# EAGLE board TCCBot_Shield (EAGLE 5.11)
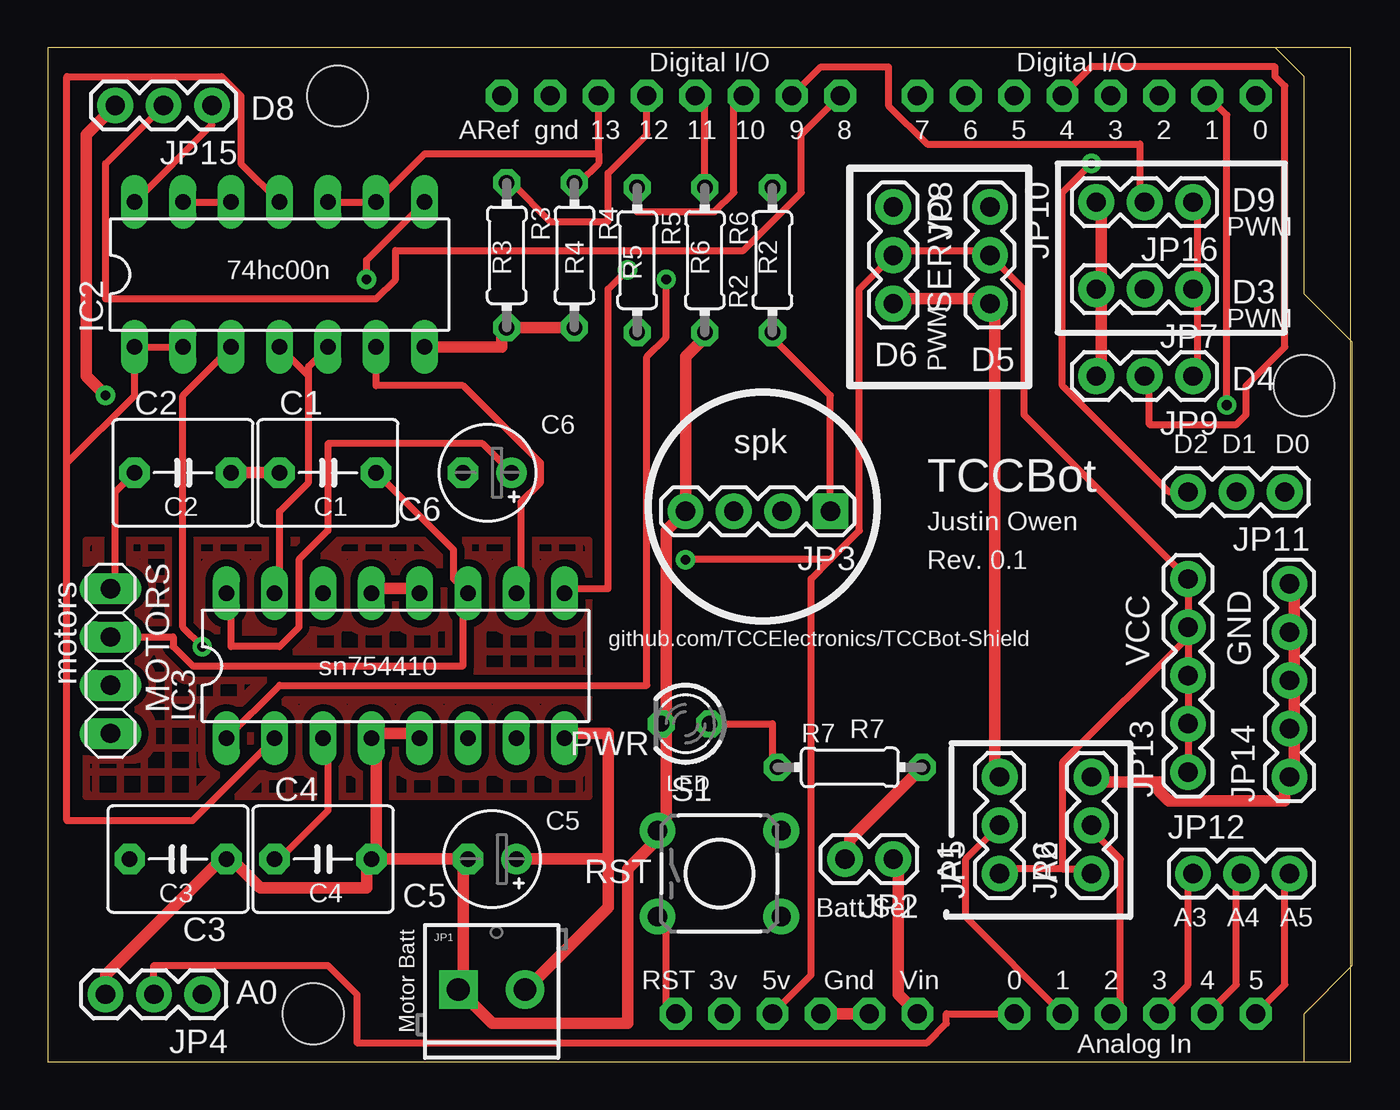
[diagram p0: board, top side]
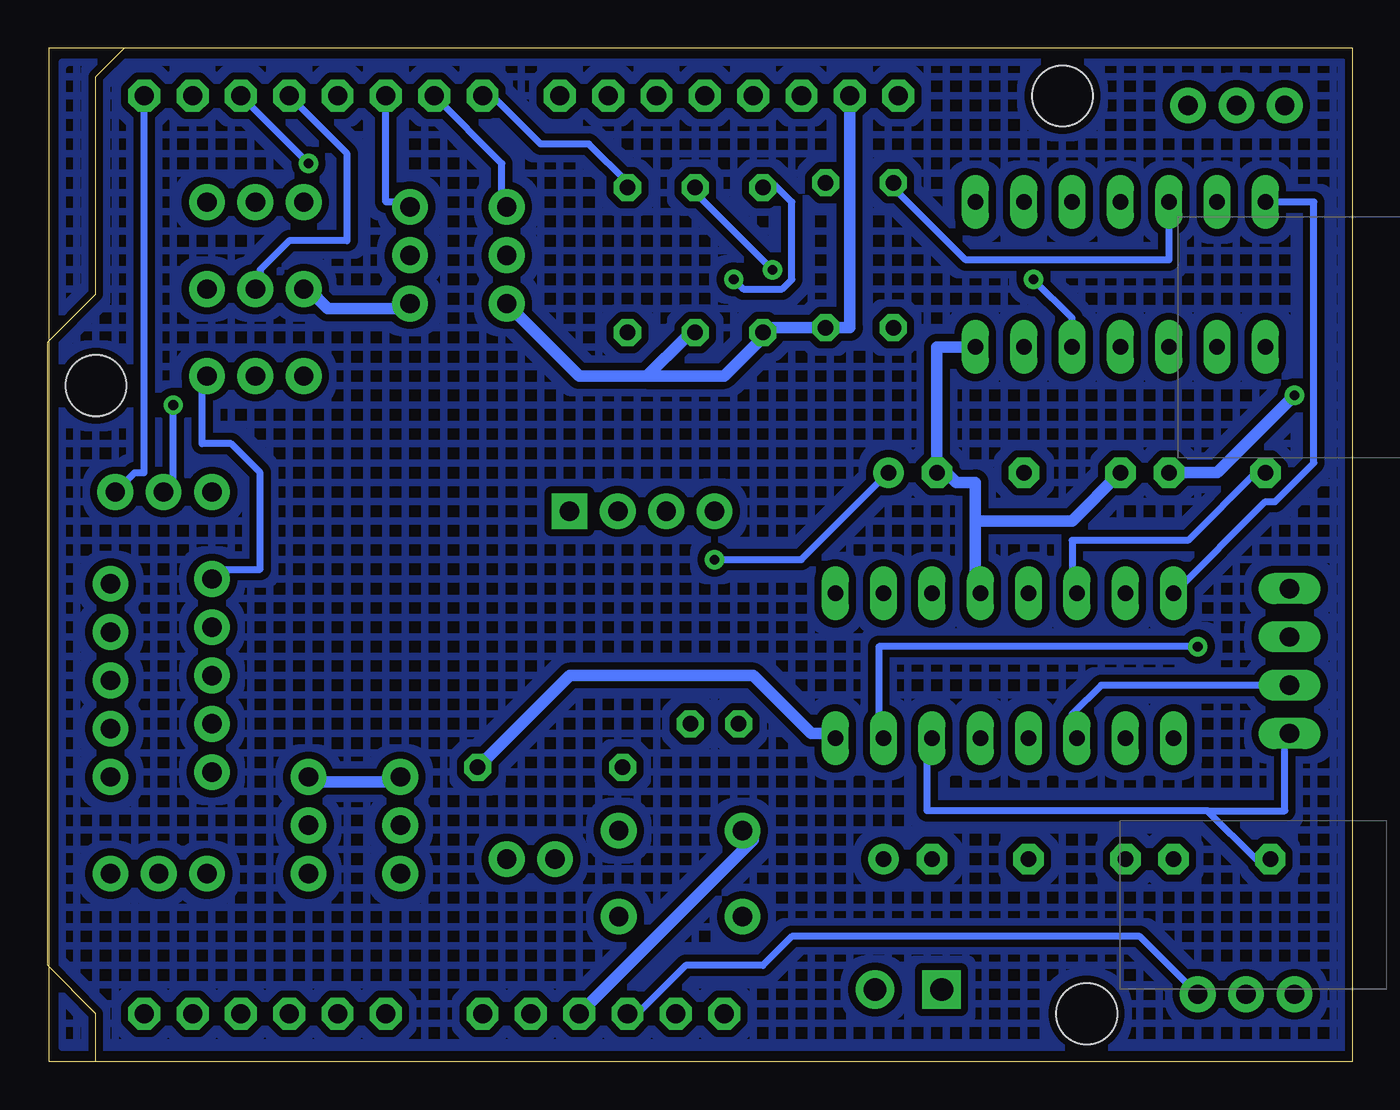
[diagram p1: board, bottom side, seen from below]

Size 68.5 x 53.33 mm. Coordinates in mm from the lower left corner, seen from the top.
Outline: 0,0 68.5,0 68.5,53.33 0,53.33 0,0
Copper layers (1*16): Top 0.035mm / dielectric 1.5mm / Bottom 0.035mm
Design rules "SparkFun": minimum track width 8mil, minimum drill 20mil, track to track 8mil, track to pad 8mil, pad to pad 8mil, via to via 8mil, smd to smd 8mil, copper to edge 10mil, drill to drill 8mil, minimum pad ring 12mil, minimum via ring 10mil, stop-mask expansion 4mil, vias tented up to drill 25mil, thermal gap 10mil
Net classes: 0 $GND: width 0.381 mm; 1 power: width 0.61 mm

## Footprints (pad centres in the part's own frame; a part is rotated, then mirrored left to right if it is on the bottom)
C5B5.5 = drill 0.813 pad 1.6 octagon: 1 -2.54,0; 2 2.54,0
E2,5-5 = drill 0.813 pad 1.6 round: + -1.27,0 | drill 0.813 pad 1.6 octagon: - 1.27,0
DIL14 = drill 0.813 long: 1 -7.62,-3.81; 2 -5.08,-3.81; 3 -2.54,-3.81; 4 0,-3.81; 5 2.54,-3.81; 6 5.08,-3.81; 7 7.62,-3.81; 8 7.62,3.81; 9 5.08,3.81; 10 2.54,3.81; 11 0,3.81; 12 -2.54,3.81; 13 -5.08,3.81; 14 -7.62,3.81
DIL16 = drill 0.813 long: 1 -8.89,-3.81; 2 -6.35,-3.81; 3 -3.81,-3.81; 4 -1.27,-3.81; 5 1.27,-3.81; 6 3.81,-3.81; 7 6.35,-3.81; 8 8.89,-3.81; 9 8.89,3.81; 10 6.35,3.81; 11 3.81,3.81; 12 1.27,3.81; 13 -1.27,3.81; 14 -3.81,3.81; 15 -6.35,3.81; 16 -8.89,3.81
SCREWTERMINAL-3.5MM-2 = drill 1.2 pad 2.032 square: 1 0,0 | drill 1.2 pad 2.032 round: 2 3.5,0
1X02 = drill 1.016 pad 1.88 round: 1 0,0; 2 2.54,0
1X04 = drill 1.016 pad 1.88 square: 1 0,0 | drill 1.016 pad 1.88 round: 2 2.54,0; 3 5.08,0; 4 7.62,0
1X03 = drill 1.016 pad 1.88 round: 1 0,0; 2 2.54,0; 3 5.08,0
1X05 = drill 1.016 pad 1.88 round: 1 0,0; 2 2.54,0; 3 5.08,0; 4 7.62,0; 5 10.16,0
1X04' = drill 1.016 long: 1 -3.81,0; 2 -1.27,0; 3 1.27,0; 4 3.81,0
LED3MM = drill 0.813 octagon: A -1.27,0; K 1.27,0
0204/7 = drill 0.813 octagon: 1 -3.81,0; 2 3.81,0
TACTILE-PTH = drill 1.016 pad 1.88 round: 1 -3.251,2.261; 2 3.251,2.261; 3 -3.251,-2.261; 4 3.251,-2.261
ARDUINO = drill 1 pad 1.676 octagon: 3V 35.56,2.54; 5V 38.1,2.54; A0 50.8,2.54; A1 53.34,2.54; A2 55.88,2.54; A3 58.42,2.54; A4 60.96,2.54; A5 63.5,2.54; AREF 23.876,50.8; D0 63.5,50.8; D1 60.96,50.8; D2 58.42,50.8; D3 55.88,50.8; D4 53.34,50.8; D5 50.8,50.8; D6 48.26,50.8; D7 45.72,50.8; D8 41.656,50.8; D9 39.116,50.8; D10 36.576,50.8; D11 34.036,50.8; D12 31.496,50.8; D13 28.956,50.8; GND 26.416,50.8; GND1 43.18,2.54; GND2 40.64,2.54; RESET 33.02,2.54; VIN 45.72,2.54 | hole 3.2: 15.24,50.8; 66.04,35.56; 13.97,2.54

## Placement (x,y rotation side)
C1  [C5B5.5]  14.73,30.99 0 top
C2  [C5B5.5]  7.11,30.99 0 top
C3  [C5B5.5]  6.86,10.67 180 top
C4  [C5B5.5]  14.48,10.67 0 top
C5  100uF  [E2,5-5]  23.37,10.67 180 top
C6  100uF  [E2,5-5]  23.11,30.99 180 top
IC2  74HC00N  [DIL14]  12.19,41.4 0 top
IC3  [DIL16]  18.29,20.83 0 top
JP1  [SCREWTERMINAL-3.5MM-2]  21.59,3.81 0 top
JP2  [1X02]  44.45,10.67 180 top
JP3  [1X04]  41.15,28.96 180 top
JP4  [1X03]  8.13,3.56 180 top
JP5  [1X03]  50.04,9.91 90 top
JP6  [1X03]  54.86,9.91 90 top
JP7  [1X03]  60.2,40.64 180 top
JP8  [1X03]  44.45,44.96 270 top
JP9  [1X03]  60.2,36.07 180 top
JP10  [1X03]  49.53,44.96 270 top
JP11  [1X03]  65.02,29.97 180 top
JP12  [1X03]  60.2,9.91 0 top
JP13  [1X05]  59.94,15.24 90 top
JP14  [1X05]  65.28,14.99 90 top
JP15  [1X03]  8.64,50.29 180 top
JP16  [1X03]  60.2,45.21 180 top
MOTORS  motors  [1X04']  3.3,21.08 270 top
PWR  [LED3MM]  33.53,17.78 180 top
R2  100  [0204/7]  38.1,42.16 90 top
R3  100K  [0204/7]  24.13,42.42 270 top
R4  100K  [0204/7]  27.69,42.42 270 top
R5  100K  [0204/7]  30.99,42.16 270 top
R6  100K  [0204/7]  34.54,42.16 270 top
R7  220-1k  [0204/7]  42.16,15.49 0 top
S1  SWITCH-MOMENTARY-2PTH  [TACTILE-PTH]  35.31,9.91 0 top
U$1  ARDUINOUNO  [ARDUINO]  0,0 0 top

## Library data of the parts
C1-C4 = capacitor-wima
C5 C6 R2-R7 = rcl
IC2 = 74xx-eu
IC3 = texas; MF: Arrow Electronics; MPN: L293E; OC_FARNELL: 1467711; OC_NEWARK: 89K0732
JP1-JP16 S1 = SparkFun
MOTORS = pinhead
PWR = led
U$1 = adafruit

## Nets
3V: U$1.3V
ANALOG0: JP4.2 U$1.A0
ANALOG1: JP5.2 U$1.A1
ANALOG2: JP6.2 U$1.A2
ANALOG3: JP12.1 U$1.A3
ANALOG4: JP12.2 U$1.A4
ANALOG5: JP12.3 U$1.A5
DIGITAL0: JP11.1 U$1.D0
DIGITAL1: JP11.2 U$1.D1
DIGITAL2: JP11.3 U$1.D2
DIGITAL3: JP7.2 U$1.D3
DIGITAL4: JP9.2 U$1.D4
DIGITAL5: JP10.1 U$1.D5
DIGITAL6: JP8.1 U$1.D6
DIGITAL7: R2.2 U$1.D7
DIGITAL8: JP15.2 U$1.D8
DIGITAL9: JP16.2 U$1.D9
DIRA: IC2.12 IC2.13 R3.1 U$1.D12
DIRB: IC2.9 IC2.10 R4.1 U$1.D13
ENABLE1: IC2.1 IC2.2 IC2.11 IC3.2
ENABLE2: IC2.4 IC2.5 IC2.8 IC3.15
GND [power]: C1.1 C2.2 C3.1 C4.2 C5.- C6.- IC2.7 IC3.4 IC3.5 IC3.12 IC3.13 JP1.1 JP3.4 JP4.3 JP5.3 JP6.3 JP7.3 JP8.3 JP9.3 JP10.3 JP14.1 JP14.2 JP14.3 JP14.4 JP14.5 JP15.3 JP16.3 PWR.K R3.2 R4.2 R5.2 R6.2 S1.1 U$1.GND U$1.GND1 U$1.GND2
N$1: JP3.1 R2.1
N$30: C4.1 IC3.3 MOTORS.3
N$31: C3.2 IC3.6 MOTORS.4
N$32: C1.2 IC3.11 MOTORS.2
N$33: C2.1 IC3.14 MOTORS.1
N$35: PWR.A R7.1
N$44: IC2.6 IC3.10
N$45: IC2.3 IC3.7
PWMA: IC3.1 R5.1 U$1.D10
PWMB: IC3.9 R6.1 U$1.D11
RESET: S1.3 U$1.RESET
V+ [power]: C5.+ IC3.8 JP1.2 JP2.2 R7.2
VCC: C6.+ IC2.14 IC3.16 JP4.1 JP5.1 JP6.1 JP7.1 JP8.2 JP9.1 JP10.2 JP13.1 JP13.2 JP13.3 JP13.4 JP13.5 JP15.1 JP16.1 U$1.5V
VIN [power]: JP2.1 U$1.VIN

## Tracks (layer width: path | path; a pad name or v marks a point on that pad's centre or on a via)
ANALOG0
  Top 0.381: U$1.A0 47.24,2.54 47.24,2.03 46.23,1.02 16.26,1.02 16.26,3.56 14.73,5.08 5.59,5.08 JP4.2
ANALOG1
  Top 0.381: U$1.A1 48.26,7.62 48.26,10.67 JP5.2
ANALOG2
  Top 0.381: U$1.A2 56.39,3.05 56.39,10.67 54.86,12.19 JP6.2
ANALOG3
  Top 0.381: U$1.A3 59.94,4.06 59.94,9.65 JP12.1
ANALOG4
  Top 0.381: U$1.A4 62.48,4.06 62.48,9.65 JP12.2
ANALOG5
  Top 0.381: U$1.A5 65.02,4.06 65.02,9.65 JP12.3
DIGITAL0
  Bottom 0.381: U$1.D0 63.5,30.99 64.01,30.99 JP11.1
DIGITAL1  (via drill 0.51)
  Top 0.381: U$1.D1 61.98,49.78 v61.98,34.54
  Bottom 0.381: v61.98,34.54 61.98,29.97 JP11.2
DIGITAL2  (via drill 0.51)
  Top 0.381: v54.86,47.24 53.34,45.72 53.34,35.56 58.93,29.97 JP11.3
  Bottom 0.381: v54.86,47.24 U$1.D2
DIGITAL3
  Bottom 0.381: U$1.D3 52.83,47.75 52.83,43.18 55.88,43.18 57.4,41.66 57.4,40.64 JP7.2
DIGITAL4
  Top 0.381: U$1.D4 54.86,52.32 64.52,52.32 64.52,51.82 65.02,51.31 65.02,37.59 62.99,35.56 62.99,34.04 62.48,33.53 57.91,33.53 57.91,36.07 JP9.2
DIGITAL5
  Bottom 0.381: U$1.D5 50.8,45.21 49.78,45.21 JP10.1
DIGITAL6
  Bottom 0.381: U$1.D6 44.7,47.24 44.7,45.21 JP8.1
DIGITAL7
  Bottom 0.381: U$1.D7 45.21,50.8 42.67,48.26 40.13,48.26 38.1,46.23 R2.2
DIGITAL8
  Top 0.381: U$1.D8 39.62,48.77 39.62,45.72 36.58,42.67 18.29,42.67 18.29,41.15 17.27,40.13 3.05,40.13 3.05,47.24 JP15.2
DIGITAL9
  Top 0.381: U$1.D9 40.64,52.32 44.2,52.32 44.2,50.29 46.23,48.26 57.4,48.26 57.4,45.21 JP16.2
DIRA
  Top 0.381: IC2.13 IC2.12 | U$1.D12 31.5,48.77 29.46,46.74 29.46,44.2 26.42,44.2 24.38,46.23 R3.1
  Bottom 0.381: IC2.12 9.65,42.16 20.32,42.16 24.38,46.23 R3.1
DIRB
  Top 0.381: IC2.10 IC2.9 19.81,47.75 28.96,47.75 | 28.96,47.75 U$1.D13 | 28.96,47.75 28.96,47.24 27.94,46.23 R4.1
ENABLE1
  Top 0.381: IC2.2 IC2.1 4.57,35.05 1.02,31.5 | 1.02,31.5 1.02,12.7 7.62,12.7 IC3.2 | IC2.11 10.16,47.24 10.16,50.8 9.14,51.82 1.02,51.82 1.02,31.5
ENABLE2  (via drill 0.51)
  Top 0.381: 13.72,36.07 13.72,36.58 IC2.5 | 13.72,36.07 13.72,30.48 12.19,28.96 12.19,24.89 IC3.15 | 13.72,36.07 IC2.4 | IC2.8 16.76,42.16 v16.76,41.15
  Bottom 0.381: v16.76,41.15 14.73,39.12 IC2.5
GND  (via drill 0.51)
  Top 0.61: C1.1 C2.2 | JP15.3 2.03,48.77 2.03,36.07 v3.05,35.05 | IC3.13 17.27,24.89 19.3,24.89 IC3.12 | IC2.7 23.88,37.59 23.88,38.61 R3.2 R4.2 | JP14.5 65.53,24.89 65.53,22.86 JP14.4 65.53,22.35 65.53,20.32 JP14.3 65.53,19.81 65.53,17.78 JP14.2 65.53,17.27 65.53,15.24 JP14.1 65.02,14.73 65.02,13.72 58.93,13.72 58.42,14.22 58.42,14.73 54.86,14.73 JP6.3 | 55.37,40.64 55.37,36.07 JP9.3 | 55.37,40.64 55.37,45.21 JP16.3 | JP7.3 55.37,40.64 | JP5.3 49.78,15.24 49.78,39.62 JP10.3 49.28,40.13 44.7,40.13 JP8.3 | JP4.3 3.05,4.57 9.14,10.67 C3.1 9.65,10.67 11.18,9.14 16.76,9.14 16.76,10.67 C4.2 17.27,10.67 | IC3.5 19.3,17.27 17.27,17.27 IC3.4 17.27,16.76 17.27,10.67 | 17.27,10.67 21.84,10.67 | 21.84,10.67 21.84,4.06 JP1.1 23.37,2.03 30.48,2.03 30.48,10.16 32,11.68 S1.1 32.51,12.19 32.51,17.78 | 21.84,10.67 C5.- | R6.2 34.54,38.1 33.53,37.08 JP3.4 32.51,27.94 32.51,17.78 | U$1.GND2 U$1.GND1 | 32.51,17.78 PWR.K
  Bottom 0.61: v3.05,35.05 7.11,30.99 C2.2 | U$1.GND 26.42,38.61 R4.2 30.99,38.61 R5.2 30.99,38.1 33.02,36.07 37.08,36.07 | IC2.7 21.84,37.59 C6.- 21.34,30.99 20.83,30.48 19.81,30.48 19.81,28.45 | 19.81,28.45 19.81,24.89 IC3.12 | C1.1 14.73,28.45 19.81,28.45 | JP7.3 54.86,40.64 53.85,39.62 49.78,39.62 JP10.3 | JP6.3 54.86,14.73 50.29,14.73 JP5.3 | U$1.GND2 31.5,11.68 31.5,12.19 32,12.19 S1.1 | 37.08,36.07 40.64,36.07 JP8.3 | 37.08,36.07 35.05,38.1 34.54,38.1 R6.2
N$1
  Top 0.381: JP3.1 41.15,35.05 38.1,38.1 R2.1
N$2
  pour Bottom (isolate 0.381, hatched): 0.51,52.58 67.82,52.58 67.82,0.76 0.25,0.76
N$3
  pour Top (isolate 0.381, hatched): 2.03,27.43 28.45,27.43 28.45,13.97 2.03,13.97
N$30
  Top 0.381: IC3.3 14.73,16.76 14.73,13.21 12.19,10.67 C4.1
  Bottom 0.381: MOTORS.3 13.21,19.81 14.73,18.29 14.73,17.27 IC3.3
N$31
  Bottom 0.381: 7.62,13.21 22.35,13.21 22.35,16.76 IC3.6 | 7.62,13.21 5.08,10.67 C3.2 | 7.62,13.21 3.56,13.21 3.56,17.27 MOTORS.4
N$32
  Top 0.381: C1.2 21.34,26.92 21.34,25.4 IC3.11 21.84,24.38 21.84,20.83 7.62,20.83 6.6,21.84 6.6,22.35 MOTORS.2
N$33
  Top 0.381: C2.1 3.56,29.97 3.56,24.89 MOTORS.1
  Bottom 0.381: C2.1 5.08,30.99 8.64,27.43 14.73,27.43 14.73,24.89 IC3.14
N$35
  Top 0.381: PWR.A 38.1,17.78 38.1,15.75 R7.1
N$44
  Top 0.381: IC2.6 17.27,35.56 21.84,35.56 25.91,31.5 25.91,30.48 24.89,29.46 24.89,24.89 IC3.10
N$45  (via drill 0.51)
  Top 0.381: v8.13,21.84 7.11,22.86 7.11,35.05 IC2.3
  Bottom 0.381: v8.13,21.84 24.89,21.84 24.89,17.27 IC3.7
PWMA  (via drill 0.51)
  Top 0.381: v32.51,41.15 32.51,38.1 31.5,37.08 31.5,19.81 12.19,19.81 IC3.1 | U$1.D10 36.07,50.29 36.07,45.72 35.05,44.7 30.99,44.7 R5.1
  Bottom 0.381: v32.51,41.15 32,40.64 29.97,40.64 29.46,41.15 29.46,45.21 30.48,46.23 30.99,46.23 R5.1
PWMB  (via drill 0.51)
  Top 0.381: v30.48,41.66 29.46,40.64 29.46,24.89 27.43,24.89 IC3.9 | U$1.D11 34.54,50.29 R6.1
  Bottom 0.381: v30.48,41.66 34.54,45.72 R6.1
RESET
  Top 0.381: U$1.RESET 32.51,3.05 32.51,7.62 S1.3
V+
  Top 0.61: R7.2 42.16,11.68 42.16,10.67 JP2.2 | 29.46,10.67 29.46,8.13 25.4,4.06 JP1.2 | 29.46,10.67 29.46,17.27 27.43,17.27 IC3.8 | 29.46,10.67 C5.+
  Bottom 0.61: R7.2 41.15,20.32 31.5,20.32 28.45,17.27 27.43,17.27 IC3.8
VCC  (via drill 0.51)
  Top 0.381: 60.45,40.64 60.45,36.07 JP9.1 | 60.45,40.64 60.45,45.21 JP16.1 | 60.45,40.64 JP7.1 | 53.34,10.16 54.86,10.16 JP6.1 | 53.34,10.16 50.29,10.16 JP5.1 | JP13.1 JP13.2 JP13.3 59.94,22.35 | 53.34,10.16 53.34,15.75 59.94,22.35 | 59.94,22.35 JP13.4 JP13.5 51.31,34.04 51.31,40.64 JP10.2 49.28,42.67 44.7,42.67 JP8.2 42.67,40.64 42.67,27.94 41.15,26.42 | IC2.14 8.64,49.28 JP15.1 | C6.+ 22.86,32.51 14.73,32.51 14.73,27.94 13.21,26.42 13.21,22.86 12.19,21.84 9.65,21.84 9.65,24.38 IC3.16 | U$1.5V 40.13,4.57 40.13,25.4 41.15,26.42 | 41.15,26.42 v33.53,26.42
  Bottom 0.381: JP13.5 59.44,25.91 57.4,25.91 57.4,30.99 58.93,32.51 60.45,32.51 60.45,36.07 JP9.1 | IC2.14 2.03,45.21 2.03,31.5 4.06,29.46 4.57,29.46 IC3.16 | JP4.1 11.18,6.6 29.46,6.6 30.99,5.08 35.05,5.08 37.59,2.54 U$1.5V | C6.+ 28.96,26.42 v33.53,26.42
VIN
  Top 0.61: U$1.VIN 44.7,3.56 44.7,10.67 JP2.1

## Text on the board
tPlace: D8 | D9 | PWM | 74hc00n | R3 | R4 | R5 | R6 | R2 | D3 | SERVO | PWM | D6 | PWM | D5 | D4 | C6 | spk | D2 | D1 | D0 | TCCBot | C2 | C1 | Justin Owen | Rev. 0.1 | github.com/TCCElectronics/TCCBot-Shield | VCC | GND | motors | sn754410 | R7 | LED | C5 | RST | A1 | A2 | C3 | C4 | Batt Sel | A3 | A4 | A5 | A0 | Motor Batt